# EAGLE board Discrete Datalogger ECU rev4 (EAGLE 9.1.3)
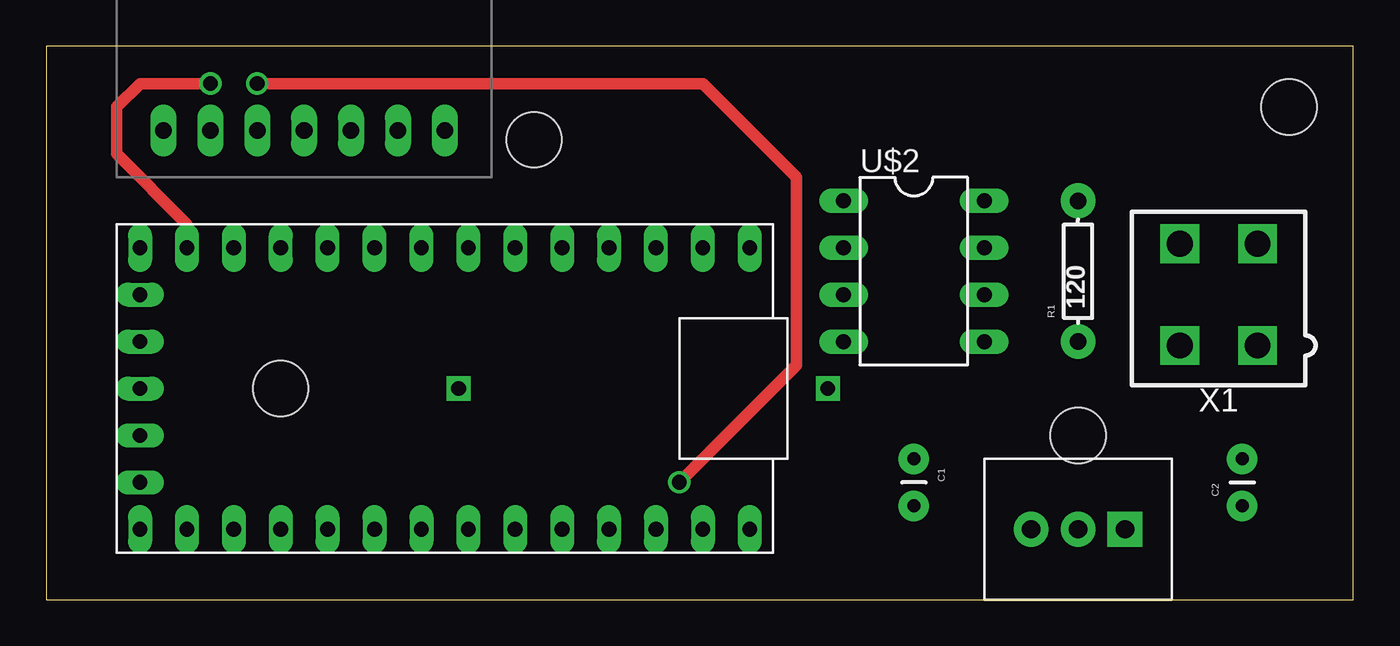
[diagram p0: board, top side]
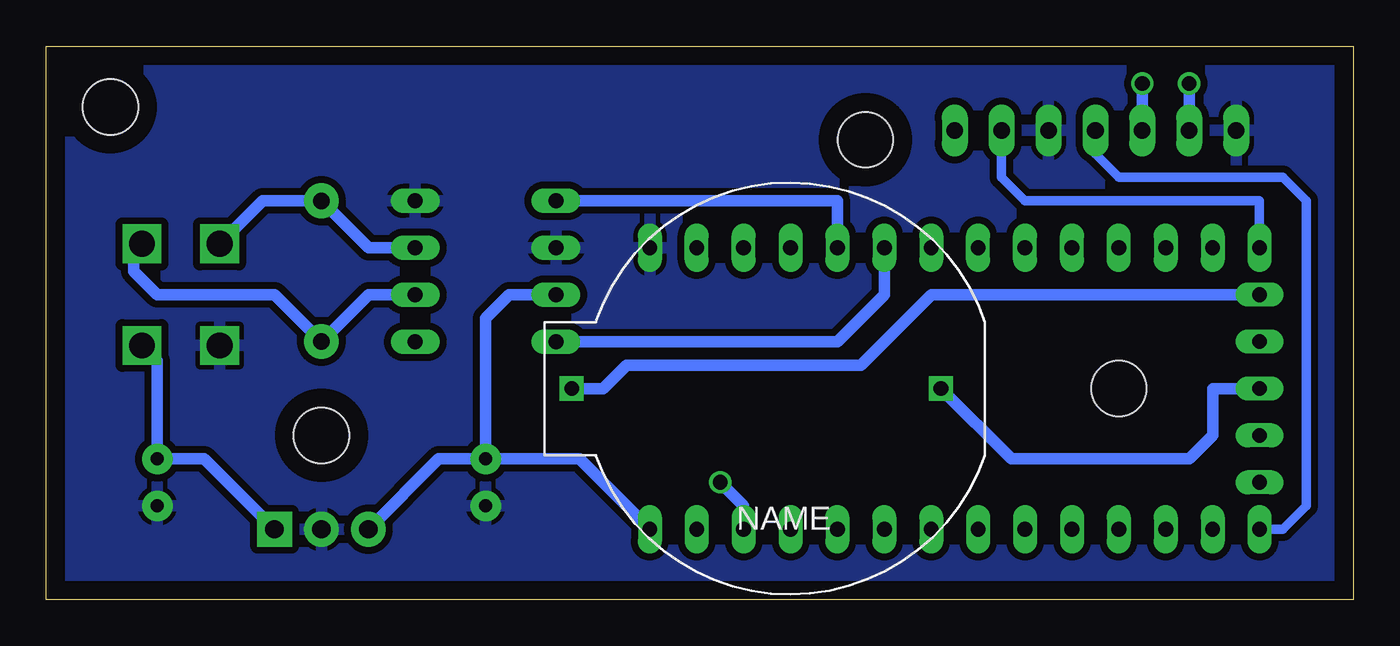
[diagram p1: board, bottom side, seen from below]

Size 70.79 x 29.96 mm. Coordinates in mm from the lower left corner, seen from the top.
Outline: 0,0 70.79,0 70.79,29.96 0,29.96 0,0
Copper layers (1*16): Top 0.035mm / dielectric 1.5mm / Bottom 0.035mm
Design rules "default *": minimum track width 6mil, minimum drill 0.35mm, track to track 15mil, track to pad 15mil, pad to pad 15mil, via to via 15mil, smd to smd 15mil, copper to edge 40mil, drill to drill 6mil, minimum pad ring 10mil, minimum via ring 8mil, stop-mask expansion 4mil, vias tented up to drill 0mil, thermal gap 10mil
Holes 3 mm at 26.42,24.89 55.88,8.89 67.31,26.67 12.7,11.43

## Footprints (pad centres in the part's own frame; a part is rotated, then mirrored left to right if it is on the bottom)
CAP-PTH-SMALL = drill 0.7 pad 1.651: 1 0,0; 2 2.54,0
TO-220 = drill 1 pad 1.88 square: 1 -2.54,0 | drill 1 pad 1.88: 2 0,0; 3 2.54,0
AXIAL-0.3 = drill 0.9 pad 1.88: P$1 -3.81,0; P$2 3.81,0
TEENSY_3.2_EXT = drill 0.8 long: 3.3V 16.51,29.21; 3.3V2 6.35,1.27; A0 16.51,3.81; A1 16.51,6.35; A2 16.51,8.89; A3 16.51,11.43; A4 16.51,13.97; A5 16.51,16.51; A6 16.51,19.05; A7 16.51,21.59; A8 16.51,24.13; A9 16.51,26.67; AGND 16.51,31.75; D0(RX1) 1.27,31.75; D1(TX1) 1.27,29.21; D2 1.27,26.67; D3(CANTX) 1.27,24.13; D4(CANRX) 1.27,21.59; D5 1.27,19.05; D6 1.27,16.51; D7(RX3) 1.27,13.97; D8(TX3) 1.27,11.43; D9(RX2) 1.27,8.89; D10(TX2) 1.27,6.35; D11 1.27,3.81; D12 1.27,1.27; D13 16.51,1.27; DAC 13.97,1.27; GND 1.27,34.29; GND2 8.89,1.27; PGRM 11.43,1.27; VBAT 3.81,1.27; VIN 16.51,34.29
DIL08 = drill 0.813 long: 1 -3.81,-3.81; 2 -1.27,-3.81; 3 1.27,-3.81; 4 3.81,-3.81; 5 3.81,3.81; 6 1.27,3.81; 7 -1.27,3.81; 8 -3.81,3.81
SDCARD_INTERFACE = drill 0.9 long: CD 2.54,0; CS 2.54,-15.24; DI 2.54,-12.7; DO 2.54,-2.54; GND 2.54,-5.08; SCK 2.54,-7.62; VCC 2.54,-10.16
COIN-CELL-HOLDER = drill 0.8 square: GND -8.15,0; VDD 11.85,0
MINIFIT_5566-4 = drill 1.4 square: 1 2.1,-2.75; 2 -2.1,-2.75; 3 2.1,2.75; 4 -2.1,2.75

## Placement (x,y rotation side)
C1  0.1uF  [CAP-PTH-SMALL]  46.99,7.62 270 top
C2  0.33uF  [CAP-PTH-SMALL]  64.77,5.08 90 top
IC1  [TO-220]  55.88,3.81 180 top
R1  120  [AXIAL-0.3]  55.88,17.78 90 top
U$1  TEENSY_3.2_EXT  [TEENSY_3.2_EXT]  3.81,20.32 270 top
U$2  MCP2551DIL  [DIL08]  46.99,17.78 270 top
U$3  SDCARD_INTERFACE  [SDCARD_INTERFACE]  21.59,27.94 270 top
U$4  COIN-CELL-HOLDER  [COIN-CELL-HOLDER]  30.48,11.43 180 bottom
X1  CONNECTOR-4  [MINIFIT_5566-4]  63.5,16.51 0 top

## Library data of the parts
C1 C2 IC1 R1 U$1-U$4 = HyTechDevices
X1 = HyTechDevices; OC_FARNELL: unknown; OC_NEWARK: unknown

## Nets
12V: C2.2 IC1.1 X1.1
CANH: R1.P$2 U$2.7 X1.4
CANL: R1.P$1 U$2.6 X1.3
GND: C1.2 C2.1 IC1.2 U$1.GND U$2.2 U$2.8 U$3.CS U$3.GND X1.2
N$1: U$1.VBAT U$4.VDD
N$2: U$1.GND2 U$4.GND
N$4: U$1.D3(CANTX) U$2.1
N$5: U$1.D4(CANRX) U$2.4
N$6: U$1.D13 U$3.SCK
N$7: U$1.D11 U$3.DI
N$8: U$1.3.3V U$3.VCC
N$9: U$1.D12 U$3.DO
VIN: C1.1 IC1.3 U$1.VIN U$2.3

## Tracks (layer width: path | path; a pad name or v marks a point on that pad's centre or on a via)
12V
  Bottom 0.61: X1.1 64.77,12.93 C2.2 62.23,7.62 IC1.1
CANH
  Bottom 0.61: U$2.7 53.34,19.05 R1.P$2 59.07,21.59 X1.4
CANL
  Bottom 0.61: U$2.6 53.34,16.51 R1.P$1 58.42,16.51 64.77,16.51 66.04,17.78 66.04,18.82 X1.3
GND
  pour Bottom: 0,30.48 71.12,30.48 71.12,0 0,0
N$1
  Bottom 0.61: U$1.VBAT 22.86,16.51 26.67,12.7 39.37,12.7 40.64,11.43 U$4.VDD
N$2
  Bottom 0.61: U$4.GND 18.52,7.62 8.89,7.62 7.62,8.89 7.62,11.43 U$1.GND2
N$4
  Bottom 0.61: U$1.D3(CANTX) 27.94,21.59 U$2.1
N$5
  Bottom 0.61: U$1.D4(CANRX) 25.4,16.51 27.94,13.97 U$2.4
N$6
  Bottom 0.508: U$3.SCK 13.97,24.13 12.7,22.86 3.81,22.86 2.54,21.59 2.54,5.08 3.81,3.81 U$1.D13
N$7  (via drill 0.8)
  Top 0.61: v8.89,27.94 5.08,27.94 3.81,26.67 3.81,24.13 7.62,20.32 U$1.D11
  Bottom 0.61: U$3.DI v8.89,27.94
N$8  (via drill 0.8)
  Top 0.61: v34.29,6.35 40.64,12.7 40.64,22.86 35.56,27.94 v11.43,27.94
  Bottom 0.61: U$1.3.3V 33.02,5.08 v34.29,6.35 | v11.43,27.94 U$3.VCC
N$9
  Bottom 0.508: U$3.DO 19.05,22.86 17.78,21.59 5.08,21.59 U$1.D12
VIN
  Bottom 0.61: U$1.VIN 41.91,7.62 C1.1 | C1.1 46.99,15.24 45.72,16.51 U$2.3 | IC1.3 49.53,7.62 C1.1

## Text on the board
tDocu: Soohyun Kim | CAN Datalogger rev4